# Altium PCB PCB1.PcbDoc
Units mil, origin at the board's own origin, x right, y up, seen from the top; angles counter-clockwise.
Board outline 3217 x 2066 mil, 2 copper layers (Top Layer, Bottom Layer); 28 components, 48 nets, 350 pads, 356 vias.
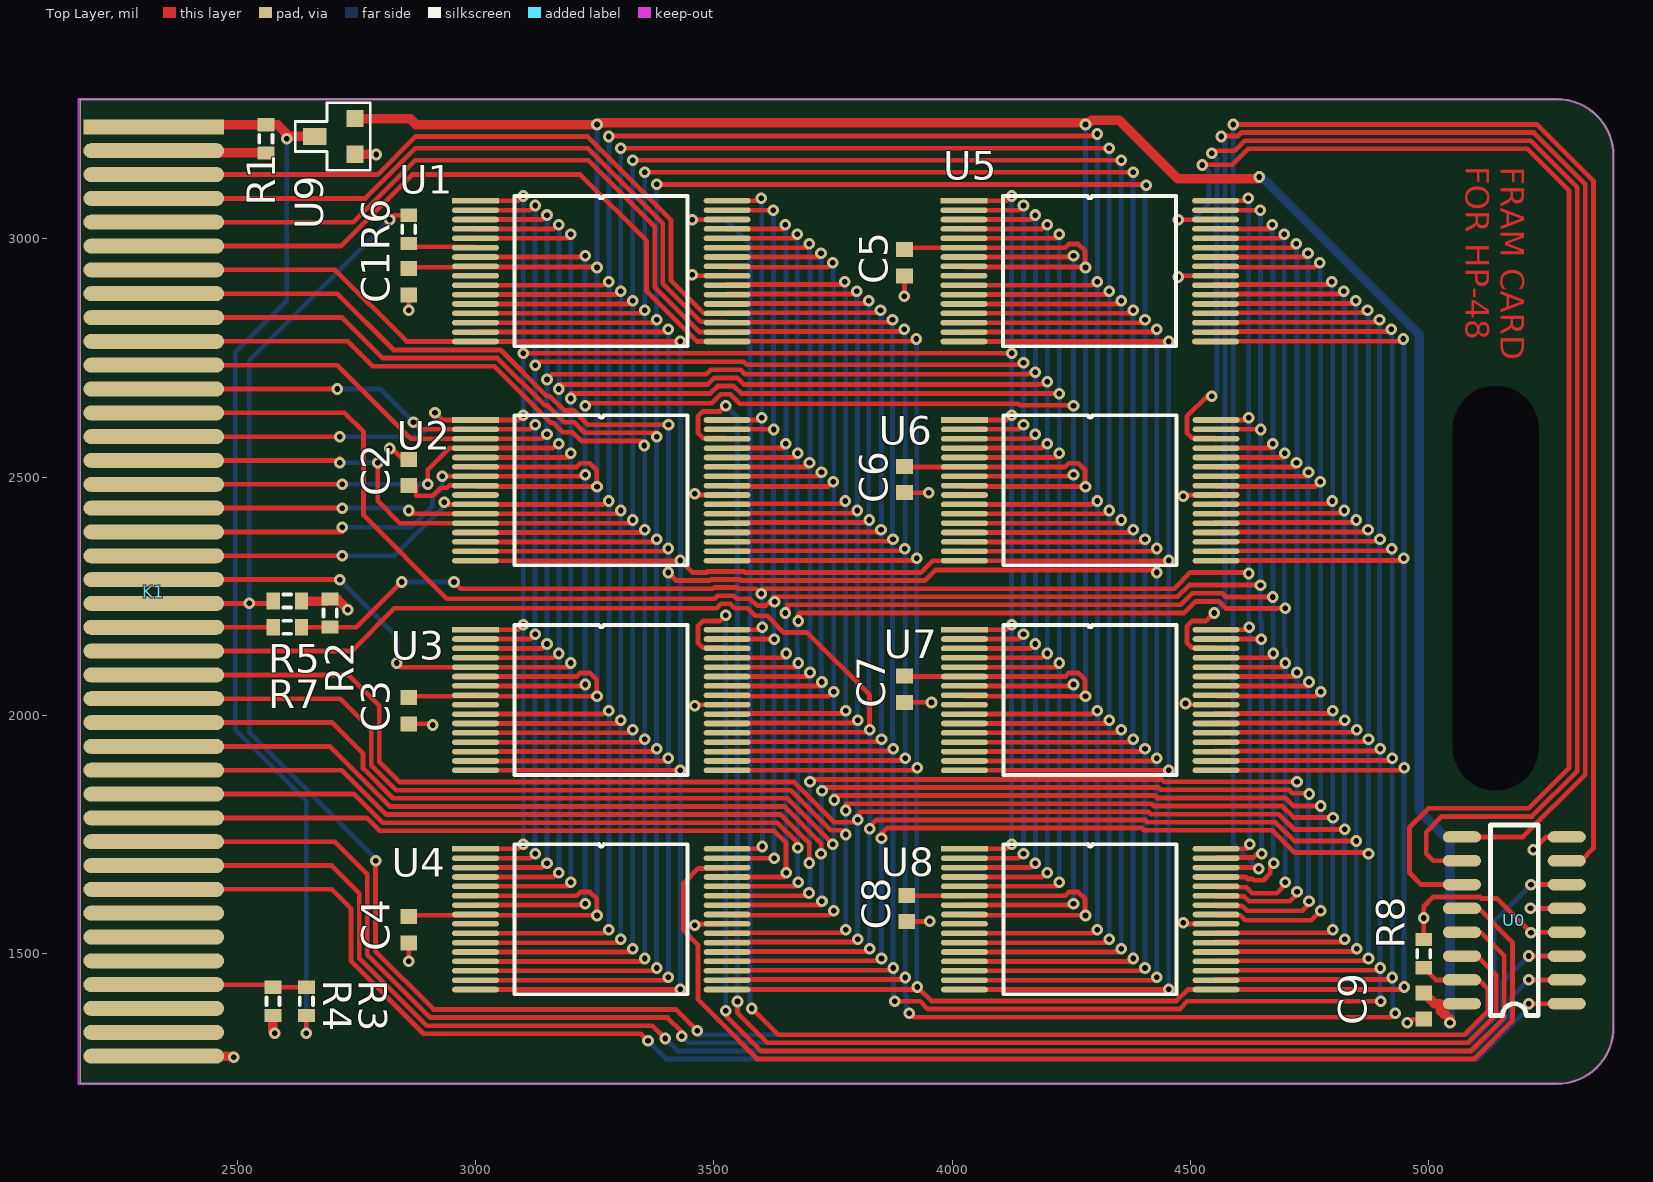
[diagram p0: Top Layer view]
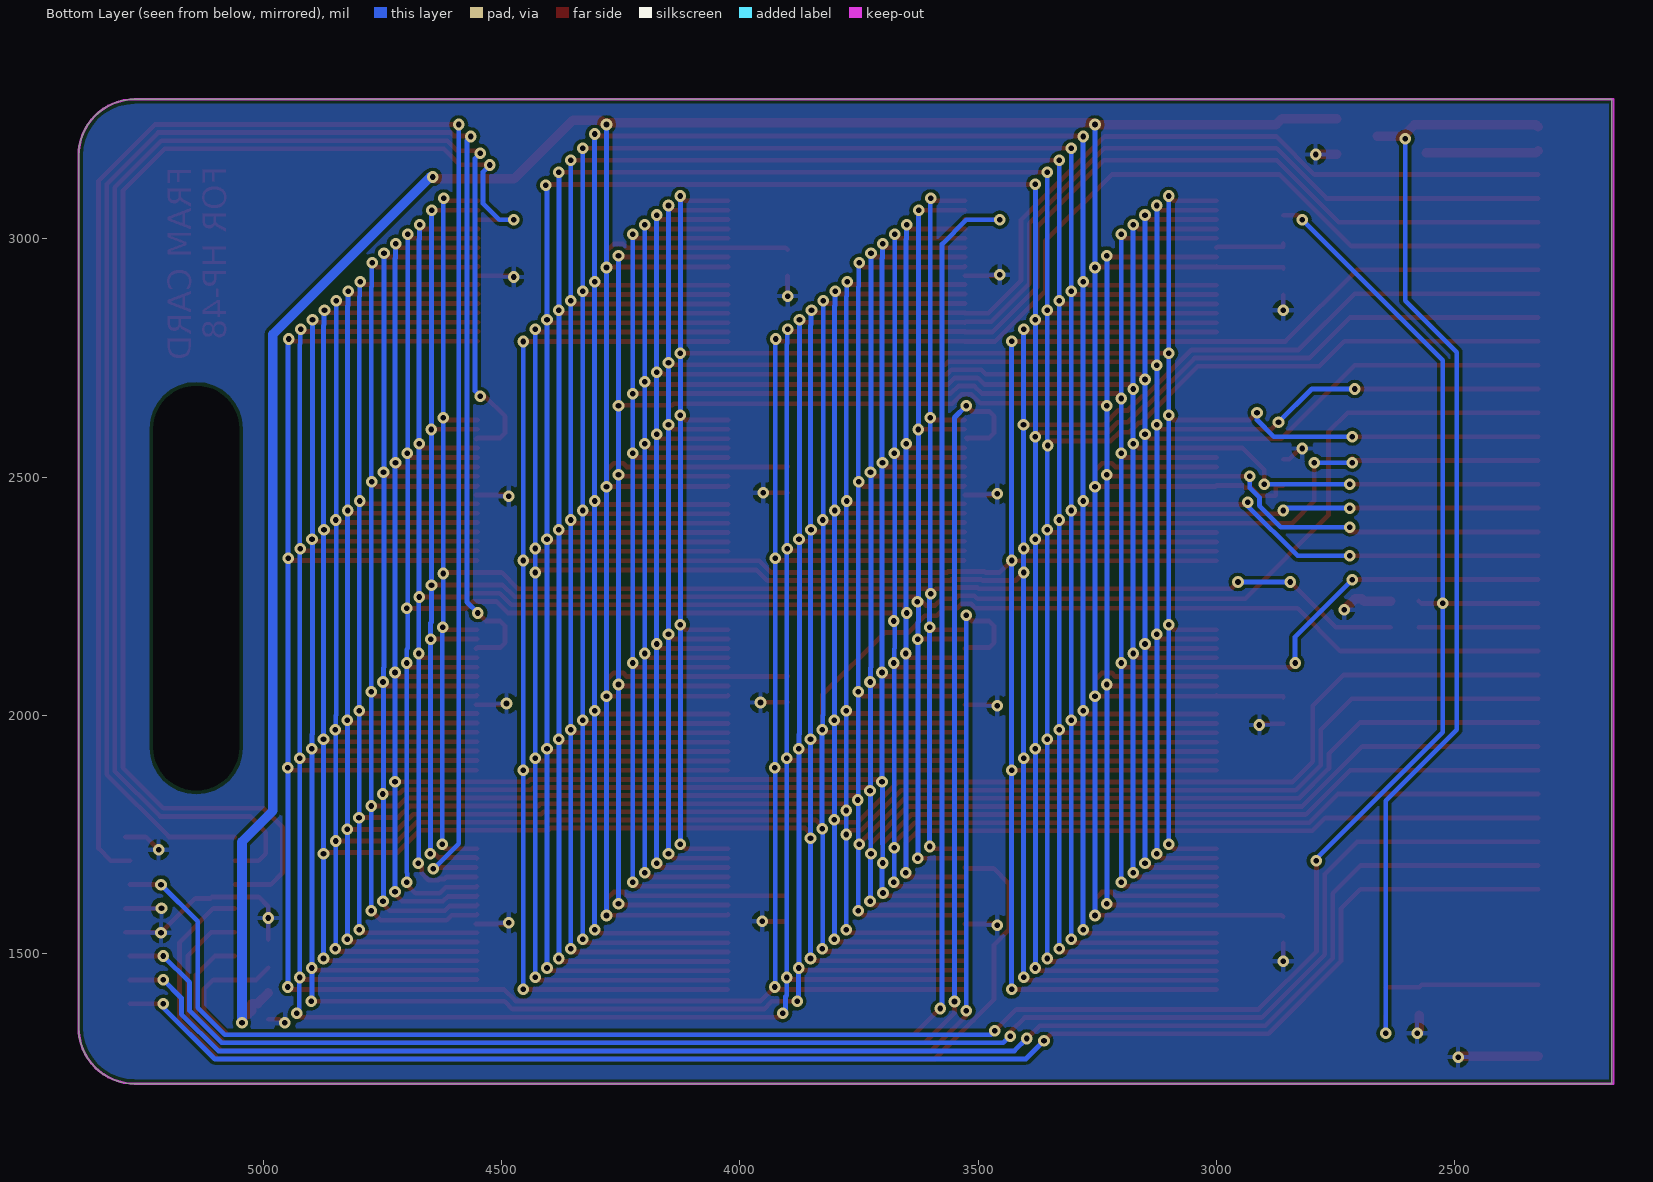
[diagram p1: Bottom Layer view, seen from below]

## Layer stack, top to bottom
Top Solder: solder mask 0.4, Solder Resist, Dk 3.5
Top Layer: signal copper 1.4
Dielectric1: dielectric 12.6, FR-4, Dk 4.8
Bottom Layer: signal copper 1.4
Bottom Solder: solder mask 0.4, Solder Resist, Dk 3.5

## Board outline
2171,1227 5270,1227 ccw(c5270,1345) 5388,1345 5388,3175 ccw(c5270,3175) 5270,3293 2171,3293

## Design rules (kind name [scope] priority, off if disabled: settings)
Clearance [All] p1: gap=7
PolygonConnect [All] p1: connectstyle=Relief reliefconductorwidth=10 reliefentries=4 polygonreliefangle="90 Angle" airgapwidth=10
RoutingVias [All] p1: holewidth=11.81 width=24.41 viastyle="Through Hole" minholewidth=11.81 minwidth=24.41 maxholewidth=11.81 maxwidth=24.41
SilkToSolderMaskClearance SilkscreenOverComponentPads [IsPad] p1: minsilkscreentomaskgap=10 clearancetoexposedcopper=TRUE
SolderMaskExpansion [All] p1: expansion=4
Width [All] p1: maxlimit=20 minlimit=7 preferedwidth=7
29 further rules are at their usual default settings.

## Components (designator, comment, footprint, x,y, rotation, side; value= is the part's Value field where it differs from the comment)
C1 "105" 1608[0603] 2860,2910 r90 top
C2 "104" 1608[0603] 2860,2510 r270 top
C3 "104" 1608[0603] 2860,2010 r90 top
C4 "104" 1608[0603] 2860,1550 r90 top
C5 "104" 1608[0603] 3900,2950 r90 top
C6 "104" 1608[0603] 3900,2495 r90 top
C7 "104" 1608[0603] 3900,2055 r90 top
C8 "104" 1608[0603] 3905,1595 r90 top
C9 "104" 1608[0603] 4990,1390 r90 top
K1 "PORT2" SOP80 2325,3235 r0 top
R1 "1M" J1-0603 2560,3210 r90 top
R2 "0R" J1-0603 2695,2215 r90 top
R3 "0R" J1-0603 2645,1400 r270 top
R4 "0R" J1-0603 2575,1400 r270 top
R5 "10K" J1-0603 2605,2240 r180 top
R6 "NC" J1-0603 2860,3020 r270 top
R7 "NC" J1-0603 2605,2185 r0 top
R8 "NC" J1-0603 4990,1500 r270 top
U0 "74ALS138" SO-16 5290,1395 r180 top
U1 "IS62LV1024LL" TSOP32 3000,3080 r0 top
U2 "IS62LV1024LL" TSOP32 3000,2620 r0 top
U3 "IS62LV1024LL" TSOP32 3000,2180 r0 top
U4 "IS62LV1024LL" TSOP32 3000,1720 r0 top
U5 "IS62LV1024LL" TSOP32 4025,3080 r0 top
U6 "IS62LV1024LL" TSOP32 4026,2620 r0 top
U7 "IS62LV1024LL" TSOP32 4026,2180 r0 top
U8 "IS62LV1024LL" TSOP32 4026,1720 r0 top
U9 "6209" SOT-23 2705,3215 r90 top

## Footprints (in the part's own frame and the unit in brackets; to place one, negate y for a bottom-side part, rotate by r counter-clockwise, add the part's x,y. Pads: shape width x height; smd on the part's side, far side on the other; paste and mask are expansions set on the pad)
1608[0603] [mm] "Chip Capacitor, Body 1.6x0.8mm, IPC High Density"
  rect 0.8x0.9 smd: 1(-0.7,0) 2(0.7,0)
  body extent -0.87,-0.48 0.87,0.48, height 1.3
J1-0603 [mm] "Chip Resistor, Body 1.6x0.8mm, IPC High Density"
  rect 0.7x0.9 smd: 1(-0.75,0) 2(0.75,0)
  silkscreen extent -0.2,-0.35 0.2,0.35, body extent -0.85,-0.48 0.85,0.48, height 0.9
SO-16 [mil]
  oval 80x24 smd: 1(0,0) 2(0,-50) 3(0,-100) 4(0,-150) 5(0,-200) 6(0,-250) 7(0,-300) 8(0,-350) 9(220,-350) 10(220,-300) 11(220,-250) 12(220,-200) 13(220,-150) 14(220,-100) 15(220,-50) 16(220,0)
  silkscreen extent 60,-375 160,25
SOP80 [mm]
  rect 7.5x0.8 smd: 1(0,0)
  oval 7.5x0.8 smd: 2(0,-1.27) 3(0,-2.54) 4(0,-3.81) 5(0,-5.08) 6(0,-6.35) 7(0,-7.62) 8(0,-8.89) 9(0,-10.16) 10(0,-11.43) 11(0,-12.7) 12(0,-13.97) 13(0,-15.24) 14(0,-16.51) 15(0,-17.78) 16(0,-19.05) 17(0,-20.32) 18(0,-21.59) 19(0,-22.86) 20(0,-24.13) 21(0,-25.4) 22(0,-26.67) 23(0,-27.94) 24(0,-29.21) 25(0,-30.48) 26(0,-31.75) 27(0,-33.02) 28(0,-34.29) 29(0,-35.56) 30(0,-36.83) 31(0,-38.1) 32(0,-39.37) 33(0,-40.64) 34(0,-41.91) 35(0,-43.18) 36(0,-44.45) 37(0,-45.72) 38(0,-46.99) 39(0,-48.26) 40(0,-49.53)
SOT-23 [mil]
  rect 36x36 smd: 1(-37.4,-42.18) 2(37.4,-42.18)
  rect 36x50 smd: 3(0,42.18)
  silkscreen extent -71,-74 71,83, body extent -55,-51 55,45, height 43
TSOP32 [mm]
  rect 2.5x0.3 smd: 1(0,0)
  oval 2.5x0.3 smd: 2(0,-0.5) 3(0,-1) 4(0,-1.5) 5(0,-2) 6(0,-2.5) 7(0,-3) 8(0,-3.5) 9(0,-4) 10(0,-4.5) 11(0,-5) 12(0,-5.5) 13(0,-6) 14(0,-6.5) 15(0,-7) 16(0,-7.5) 17(13.412,-7.5) 18(13.412,-7) 19(13.412,-6.5) 20(13.412,-6) 21(13.412,-5.5) 22(13.412,-5) 23(13.412,-4.5) 24(13.412,-4) 25(13.412,-3.5) 26(13.412,-3) 27(13.412,-2.5) 28(13.412,-2) 29(13.412,-1.5) 30(13.412,-1) 31(13.412,-0.5) 32(13.412,0)
  silkscreen extent 2.08,-7.75 11.3,0.25

## Part data
C1 C2 C3 C4 C5 C6 C7 C8 C9: library part "Cap Semi", "Capacitor (Semiconductor SIM Model)"
R1 R2 R3 R4 R5 R6 R7 R8: library part Res3, "Resistor"

## Free pads (board coordinates)
  round 0 hole 180 slot 850 at 90 deg: 0(5141,2267)

## Via types
v1: diameter 24.41, hole 11.81, Top Layer to Bottom Layer, 356 vias

## Nets (pads, with @x,y where several pads share a name; then routed paths per layer and width w, separated by ;. In a path a pad name is that pad's centre, name@x,y a point inside that pad or via, vN(x,y) a via of type N, cw(c..) or ccw(c..) an arc to the next point about the centre after c; other vN are vias at no path point)
A0: K1.3 U1.20 U2.20 U3.20 U4.20 U5.20 U6.20 U7.20 U8.20 | length 7838.4
  Top Layer w10: K1.3 2795,3135 2875,3215 3235,3215 3410,3040 3410,2912.87 3479.09,2843.78 U1.20 ; U1.20@3528.03,2844.98 3844.98,2844.98 v1(3850,2850) ; U2.20@3529.03,2384.98 3845.98,2384.98 v1(3851,2390) ; U4.20@3530.03,1484.98 3846.98,1484.98 v1(3852,1490) ; U3.20@3530.03,1944.98 3846.98,1944.98 v1(3852,1950) ; v1(3852,1741.95) 3852,1752 3863.8,1763.8 4397.72,1763.8 4402.72,1758.8 4671.56,1758.8 4717.97,1712.39 4872.61,1712.39 4874,1711 v1(4874,1710) ; U5.20@4550.03,2844.98 4866.98,2844.98 v1(4872,2850) ; U6.20@4551.03,2384.98 4867.98,2384.98 v1(4873,2390) ; U8.20@4552.03,1484.98 4868.98,1484.98 v1(4874,1490) ; U7.20@4552.03,1944.98 4868.98,1944.98 v1(4874,1950)
  Bottom Layer w10: v1(3850,2850) 3850.8,2849.2 3850.8,2819.97 3851.8,2818.97 3851.8,1490.2 v1(3852,1490) ; v1(4872,2850) 4872.8,2849.2 4872.8,2819.97 4873.8,2818.97 v1@4873.8,1710 ; v1(4874,1490) 4873.8,1490.2 v1@4873.8,1710 ; v1(4874,1710) v1@4873.8,1710
A1: K1.4 U1.19 U2.19 U3.19 U4.19 U5.19 U6.19 U7.19 U8.19 | length 8160.6
  Top Layer w10: K1.4 2769.04,3085 2874.04,3190 3235.96,3190 3393,3032.96 3393,2905.83 3472.95,2825.87 3526.25,2825.87 U1.19 ; U1.19@3528.03,2825.3 3870.3,2825.3 v1(3875,2830) ; U2.19@3529.03,2365.3 3871.3,2365.3 v1(3876,2370) ; U4.19@3530.03,1465.3 3872.3,1465.3 v1(3877,1470) ; U3.19@3530.03,1925.3 3872.3,1925.3 v1(3877,1930) ; v1(3880,1400) 3932.96,1400 3949.16,1383.8 4477.84,1383.8 4494.04,1400 v1(4900,1400) ; U5.19@4550.03,2825.3 4892.3,2825.3 v1(4897,2830) ; U6.19@4551.03,2365.3 4893.3,2365.3 v1(4898,2370) ; U8.19@4552.03,1465.3 4894.3,1465.3 v1(4899,1470) ; U7.19@4552.03,1925.3 4894.3,1925.3 v1(4899,1930)
  Bottom Layer w10: v1(3875,2830) 3875.2,2829.8 3875.2,1961.03 3876.2,1960.03 3876.2,1470.8 v1(3877,1470) 3877,1403 v1(3880,1400) ; v1(4897,2830) 4897.2,2829.8 4897.2,1961.03 4898.2,1960.03 4898.2,1401.8 v1(4900,1400)
A2: K1.5 U1.18 U2.18 U3.18 U4.18 U5.18 U6.18 U7.18 U8.18 | length 8375.2
  Top Layer w10: K1.5 2743.08,3035 2873.08,3165 3236.92,3165 3376,3025.92 3376,2898.78 3470.37,2804.41 U1.18 ; U1.18@3528.03,2805.61 3895.61,2805.61 v1(3900,2810) ; U2.18@3529.03,2345.61 3896.61,2345.61 v1(3901,2350) ; U4.18@3530.03,1445.61 3897.61,1445.61 v1(3902,1450) ; U3.18@3530.03,1905.61 3897.61,1905.61 v1(3902,1910) ; v1(3910,1375) 3918.2,1366.8 4921.8,1366.8 v1(4930,1375) ; U5.18@4550.03,2805.61 4917.61,2805.61 v1(4922,2810) ; U6.18@4551.03,2345.61 4918.61,2345.61 v1(4923,2350) ; U8.18@4552.03,1445.61 4919.61,1445.61 v1(4924,1450) ; U7.18@4552.03,1905.61 4919.61,1905.61 v1(4924,1910)
  Bottom Layer w10: v1(3900,2810) 3900.8,2809.2 3900.8,2779.97 3901.8,2778.97 3901.8,1450.2 v1(3902,1450) 3902,1412.23 3904.2,1410.03 3904.2,1380.8 v1(3910,1375) ; v1(4922,2810) 4922.8,2809.2 4922.8,2779.97 4923.8,2778.97 4923.8,1450.2 v1(4924,1450) 4924.8,1449.2 4924.8,1380.2 v1(4930,1375)
A3: K1.6 U1.17 U2.17 U3.17 U4.17 U5.17 U6.17 U7.17 U8.17 | length 8027.8
  Top Layer w10: K1.6 2717.12,2985 2867.12,3135 3220,3135 3359,2996 3359,2890.23 3464.51,2784.72 U1.17 ; U1.17@3528.96,2785 3920,2785 v1(3925,2790) ; U2.17@3529.96,2325 3921,2325 v1(3926,2330) ; U4.17@3530.96,1425 3922,1425 v1(3927,1430) 3956.2,1400.8 4470.8,1400.8 4494.73,1424.72 U8.17 ; U3.17@3530.96,1885 3922,1885 v1(3927,1890) ; U5.17@4550.96,2785 4942,2785 v1(4947,2790) ; U6.17@4551.96,2325 4943,2325 v1(4948,2330) ; U8.17@4552.96,1425 4944,1425 v1(4949,1430) ; U7.17@4552.96,1885 4944,1885 v1(4949,1890)
  Bottom Layer w10: v1(3925,2790) 3926.2,2788.8 3926.2,1430.8 v1(3927,1430) ; v1(4947,2790) 4948.2,2788.8 4948.2,1430.8 v1(4949,1430)
A4: K1.7 U1.16 U2.16 U3.16 U4.16 U5.16 U6.16 U7.16 U8.16 | length 7512.6
  Top Layer w10: K1.7 2705,2935 2855.28,2784.72 U1.16 3429.72,2784.72 v1(3430,2785) ; U4.16 3429.72,1424.72 v1(3430,1425) ; U3.16 3429.72,1884.72 v1(3430,1885) ; U2.16 3429.72,2324.72 v1(3430,2325) 3455,2300 3484.6,2300 3486.81,2302.2 3563.19,2302.2 3565.4,2300 3935,2300 3959.72,2324.72 U6.16 v1@4454.73,2324.72 ; U5.16 v1(4454.73,2784.72) ; U8.16 4454.73,1424.72 v1(4455,1425) ; U7.16 4454.73,1884.72 v1(4455,1885)
  Bottom Layer w10: v1(3430,1425) v1(3430,1885) v1(3430,2325) v1(3430,2785) ; v1(4454.73,2784.72) 4454.73,2325.28 v1(4455,2325) v1(4455,1885) v1(4455,1425)
A5: K1.8 U1.15 U2.15 U3.15 U4.15 U5.15 U6.15 U7.15 U8.15 | length 8222.2
  Top Layer w10: K1.8 2710,2885 2828.18,2766.82 3053.18,2766.82 3150,2670 3155.77,2670 3185.77,2640 3205.8,2640 ; U4.15 3398.59,1444.41 3404.39,1450.21 v1(3404.79,1450.21) ; U3.15 v1@3398.59,1904.41 ; U2.15 v1@3398.59,2344.41 ; U1.15 3398.59,2804.41 3404.39,2810.21 v1(3404.79,2810.21) ; 3205.8,2639.97 3235.77,2610 v1(3405,2610) ; v1@3400,2300 v1(3404.79,2300) 3421.79,2283 3491.64,2283 3493.85,2285.2 3556.15,2285.2 3558.36,2283 3943,2283 3965,2305 4430,2305 v1(4430,2300) ; U8.15@4025,1444.41 v1@4423.59,1444.41 ; U7.15@4025,1904.41 v1@4423.59,1904.41 ; U6.15@4025,2344.41 v1@4423.59,2344.41 ; U5.15 4423.59,2804.41 4429.39,2810.21 v1(4429.79,2810.21)
  Bottom Layer w10: v1@3399,1446 3404.79,1451.79 v1(3404.79,1910.21) v1(3404.79,2300) v1(3404.79,2350.21) v1(3404.79,2810.21) ; v1@3399,1906 v1@3403.21,1910.21 ; v1@3399,2346 v1@3403.21,2350.21 ; v1@3399,2806 v1@3403.21,2810.21 ; v1@4424,1906 v1@4428.21,1910.21 ; v1@4424,2346 v1@4428.21,2350.21 ; v1@4424,2806 v1@4428.21,2810.21 ; v1@4429.79,1451.79 v1(4429.79,1910.21) v1(4429.79,2350.21) v1(4429.79,2810.21)
  other v1: 4429.79,1450.21
A6: K1.9 U1.14 U2.14 U3.14 U4.14 U5.14 U6.14 U7.14 U8.14 | length 8544.9
  Top Layer w10: K1.9 2720,2835 2805.18,2749.82 3046.14,2749.82 3145.09,2650.86 3150.86,2650.86 3186.73,2615 3206.73,2615 3228.73,2593 3380,2593 v1(3380,2585) ; U4.14 3374.09,1464.1 v1(3380,1470) ; U3.14 3374.09,1924.1 v1(3380,1930) ; U2.14 3374.09,2364.09 v1(3380,2370) ; U1.14 3374.09,2824.09 v1(3380,2830) ; v1(3380,3115) 3380.8,3114.2 4405.8,3114.2 v1(4407.5,3112.5) ; U8.14@4025,1464.1 4399.1,1464.1 v1(4405,1470) ; U7.14@4025,1924.1 4399.1,1924.1 v1(4405,1930) ; U6.14@4025,2364.09 4399.1,2364.09 v1(4405,2370) ; U5.14 4399.1,2824.09 v1(4405,2830)
  Bottom Layer w10: v1(3380,1470) v1(3380,1930) v1(3380,2370) v1(3380,2585) v1(3380,2830) v1(3380,3115) ; v1(4405,1470) v1(4405,1930) v1(4405,2370) v1(4405,2830) 4405,3115 v1(4407.5,3112.5)
A7: K1.10 U1.13 U2.13 U3.13 U4.13 U5.13 U6.13 U7.13 U8.13 | length 8308
  Top Layer w10: K1.10 2731.92,2785 2784.1,2732.82 3039.1,2732.82 3157.71,2614.2 3163.48,2614.2 3183.48,2594.2 3203.48,2594.2 3221.69,2576 3349,2576 3354.2,2570.8 v1(3354.2,2566.38) ; U4.13 3348.78,1483.78 v1(3355,1490) ; U3.13 3348.78,1943.78 v1(3355,1950) ; U2.13 3348.78,2383.78 v1(3355,2390) ; U1.13 3348.78,2843.78 v1(3355,2850) ; v1(3355,3140) v1(4380,3140) ; U8.13@4025,1483.78 4373.78,1483.78 v1(4380,1490) ; U7.13@4025,1943.78 4373.78,1943.78 v1(4380,1950) ; U6.13@4025,2383.78 4373.78,2383.78 v1(4380,2390) ; U5.13 4373.78,2843.78 v1(4380,2850)
  Bottom Layer w10: v1(3355,1490) v1(3355,1950) v1(3355,2390) v1(3355,2850) v1(3355,3140) ; v1(4380,1490) v1(4380,1950) v1(4380,2390) v1(4380,2850) v1(4380,3140)
A8: K1.11 U1.3 U2.3 U3.3 U4.3 U5.3 U6.3 U7.3 U8.3 | length 5683.6
  Top Layer w10: K1.11 2710,2735 2864.37,2580.63 U2.3 3140,2580.63 ; U4.3 3140,1680.63 ; U3.3 3140,2140.63 ; U1.3 3140,3040.63 3145.91,3046.54 3148.46,3046.54 3150,3045 v1(3150,3050) ; v1(3150,2705) 3160,2715 3160,2715.8 3484.44,2715.8 3493.85,2725.2 3556.15,2725.2 3565.56,2715.8 4160.03,2715.8 4163.03,2718.8 4167.8,2718.8 4175,2711.59 v1(4175,2720) ; U8.3@4025,1680.63 4165,1680.63 4170.91,1686.54 4173.46,1686.54 4175,1685 v1(4175,1690) ; U7.3@4025,2140.63 4165,2140.63 ; U6.3@4025,2580.63 4165,2580.63 ; U5.3 4165,3040.63 4170.91,3046.54 4173.46,3046.54 4175,3045 v1(4175,3050)
  Bottom Layer w10: v1(3150,1690) v1(3150,2150) v1(3150,2590) v1(3150,3050) ; v1(4175,1690) v1(4175,2150) v1(4175,2590) v1(4175,3050)
A9: K1.12 U1.2 U2.2 U3.2 U4.2 U5.2 U6.2 U7.2 U8.2 | length 5496.5
  Top Layer w10: K1.12 v1(2710,2685) ; v1(2870,2615) 2884.68,2600.32 U2.2 3115.32,2600.32 v1(3125,2610) ; U4.2 3115.32,1700.32 v1(3125,1710) ; U3.2 3115.32,2160.32 v1(3125,2170) ; U1.2 3115.32,3060.32 v1(3125,3070) ; v1(3125,2735) 3132.2,2742.2 3563.19,2742.2 3569.6,2735.8 4149.2,2735.8 4150,2736.59 v1(4150,2740) ; U8.2@4025,1700.32 4140.31,1700.32 v1(4150,1710) ; U7.2@4025,2160.32 4140.31,2160.32 v1(4150,2170) ; U6.2@4025,2600.32 4140.31,2600.32 v1(4150,2610) ; U5.2 4140.31,3060.32 v1(4150,3070)
  Bottom Layer w10: v1(2710,2685) 2800,2685 v1(2870,2615) ; v1(3125,1710) v1(3125,2170) v1(3125,2610) v1(3125,2735) v1(3125,3070) ; v1(4150,1710) v1(4150,2170) v1(4150,2610) v1(4150,3070)
A10: K1.13 U1.31 U2.31 U3.31 U4.31 U5.31 U6.31 U7.31 U8.31 | length 6125.7
  Top Layer w10: K1.13 2725,2635 2765,2595 2765,2420 2940,2245 3501.73,2245 3507.93,2251.2 3542.07,2251.2 3548.27,2245 3575.77,2245 3589.97,2230.8 3610.03,2230.8 3619.99,2240.76 3625,2240.76 3625,2249 4473.04,2249 4497.63,2273.59 4646.41,2273.59 v1(4647.2,2272.8) ; U1.31 3624.68,3060.32 v1(3625,3060) ; U2.31@3529.03,2600.32 3625.68,2600.32 v1(3626,2600) ; U4.31@3530.03,1700.32 3626.68,1700.32 v1(3627,1700) ; U3.31@3530.03,2160.32 3626.68,2160.32 v1(3627,2160) v1@3631,2160 ; U5.31@4550.03,3060.32 4646.69,3060.32 v1(4647,3060) ; U6.31@4551.03,2600.32 4647.69,2600.32 v1(4648,2600) ; U8.31@4552.03,1700.32 4552.35,1700 4554.44,1702.09 4632.86,1702.09 4640.77,1710 v1(4650,1710) ; U7.31@4552.03,2160.32 4648.69,2160.32 v1(4649,2160)
  Bottom Layer w10: v1(3625,3060) 3625.2,3059.8 3625.2,2196.03 3626.2,2195.03 3626.2,1700.8 v1(3627,1700) ; v1(4647,3060) 4647.2,3059.8 v1(4647.2,2272.8) 4647.2,2196.03 4649.2,2194.03 4649.2,1711 v1@4648.2,1710 ; v1@4650,1702.59 v1(4650,1710)
  other v1: 3627.59,2238.17
A11: K1.14 U1.1 U2.1 U3.1 U4.1 U5.1 U6.1 U7.1 U8.1 | length 5288.8
  Top Layer w10: K1.14 v1(2715,2585) ; v1(2915,2635) 2930,2620 U2.1 3090,2620 v1(3100,2630) ; U4.1 3090,1720 v1(3100,1730) ; U3.1 3090,2180 v1(3100,2190) ; U1.1 3090,3080 v1(3100,3090) ; v1(3100,2760) v1(4125,2760) ; U8.1@4025,1720 4115,1720 v1(4125,1730) ; U7.1@4025,2180 4115,2180 v1(4125,2190) ; U6.1@4025,2620 4115,2620 v1(4125,2630) ; U5.1 4115,3080 v1(4125,3090)
  Bottom Layer w10: v1(2715,2585) 2880,2585 2915,2620 v1(2915,2635) ; v1(3100,1730) v1(3100,2190) v1(3100,2630) v1(3100,2760) v1(3100,3090) ; v1(4125,1730) v1(4125,2190) v1(4125,2630) v1(4125,2760) v1(4125,3090)
A12: K1.15 U1.12 U2.12 U3.12 U4.12 U5.12 U6.12 U7.12 U8.12 | length 7794.7
  Top Layer w10: K1.15 2710,2535 2715,2540 v1(2715,2530) ; v1(2795,2530) 2795,2450 2841.53,2403.47 U2.12 3323.47,2403.47 v1(3330,2410) ; U4.12 3323.47,1503.46 v1(3330,1510) ; U3.12 3323.47,1963.46 v1(3330,1970) ; U1.12 3323.47,2863.47 v1(3330,2870) ; v1(3330,3165) v1(4355,3165) ; U8.12@4025,1503.46 4348.47,1503.46 v1(4355,1510) ; U7.12@4025,1963.46 4348.47,1963.46 v1(4355,1970) ; U6.12@4025,2403.47 4348.47,2403.47 v1(4355,2410) ; U5.12 4348.47,2863.47 v1(4355,2870)
  Bottom Layer w10: v1(2715,2530) v1(2795,2530) ; v1@3324.13,1510 v1(3330,1510) v1(3330,1970) v1(3330,2410) v1(3330,2870) v1(3330,3165) ; v1@4349.13,1510 v1(4355,1510) v1(4355,1970) v1(4355,2410) v1(4355,2870) v1(4355,3165)
A13: K1.16 U1.4 U2.4 U3.4 U4.4 U5.4 U6.4 U7.4 U8.4 | length 5851.3
  Top Layer w10: K1.16 v1(2720,2485) ; v1(2900,2485) 2900,2515.95 2945,2560.95 U2.4 3164.05,2560.95 ; U4.4 3164.05,1660.94 ; U3.4 3164.05,2120.95 ; U1.4 3164.05,3020.95 3163.67,3021.33 3172.34,3030 v1(3175,3030) ; v1(3175,2685) 3175,2694.18 3175.41,2694.59 3487.28,2694.59 3500.89,2708.2 3549.11,2708.2 3562.72,2694.59 4182.04,2694.59 4182.45,2695 4195,2695 v1(4200,2700) ; U8.4@4025,1660.94 4189.06,1660.94 4188.67,1661.33 4197.34,1670 v1(4200,1670) ; U7.4@4025,2120.95 4189.06,2120.95 ; U6.4@4025,2560.95 4189.06,2560.95 ; U5.4 4189.06,3020.95 4188.67,3021.33 4197.34,3030 v1(4200,3030)
  Bottom Layer w10: v1(2720,2485) v1(2900,2485) ; v1(3175,1670) v1(3175,2130) v1(3175,2570) v1(3175,3030) ; v1(4200,1670) v1(4200,2130) v1(4200,2570) v1(4200,2700) v1(4200,3030)
A14: K1.17 U1.11 U2.11 U3.11 U4.11 U5.11 U6.11 U7.11 U8.11 | length 7502.5
  Top Layer w10: K1.17 v1(2720,2435) ; v1(2860,2430) 2866.85,2423.15 U2.11 3298.15,2423.15 v1(3305,2430) ; U4.11 3298.15,1523.15 v1(3305,1530) ; U3.11 3298.15,1983.15 v1(3305,1990) ; U1.11 3298.15,2883.15 v1(3305,2890) ; v1(3305,3190) v1(4330,3190) ; U8.11@4025,1523.15 4323.15,1523.15 v1(4330,1530) ; U7.11@4025,1983.15 4323.15,1983.15 v1(4330,1990) ; U6.11@4025,2423.15 4323.15,2423.15 v1(4330,2430) ; U5.11 4323.15,2883.15 v1(4330,2890)
  Bottom Layer w10: v1(2720,2435) v1@2860,2435 ; v1(3305,1530) 3301,1530 3305,1534 v1(3305,1990) v1(3305,2430) v1(3305,2890) v1(3305,3190) ; v1(4330,1530) 4326,1530 4330,1534 v1(4330,1990) v1(4330,2430) v1(4330,2890) 4326,2890 4330,2894 v1(4330,3190)
A15: K1.18 U1.7 U2.7 U3.7 U4.7 U5.7 U6.7 U7.7 U8.7 | length 6405.1
  Top Layer w10: K1.18 2720,2385 v1(2720,2395) ; v1(2930,2501.89) U2.7 3231.89,2501.89 3230,2503.78 v1(3230,2505) ; U4.7 3231.89,1601.89 3230,1603.78 v1(3230,1605) ; U3.7 3231.89,2061.89 3230,2063.78 v1(3230,2065) ; U1.7 3231.89,2961.89 3230,2963.78 v1(3230,2965) ; v1(3230,2650) 3234.91,2654.91 3495.67,2654.91 3514.97,2674.2 3535.03,2674.2 3555.03,2654.2 4139.2,2654.2 4142.61,2650.8 4254.2,2650.8 v1(4255,2650) ; U8.7@4025,1601.89 4256.89,1601.89 4255,1603.78 v1(4255,1605) ; U7.7@4025,2061.89 4256.89,2061.89 4255,2063.78 v1(4255,2065) ; U6.7@4025,2501.89 4256.89,2501.89 4255,2503.78 v1(4255,2505) ; U5.7 4256.89,2961.89 4255,2963.78 v1(4255,2965)
  Bottom Layer w10: v1(2720,2395) 2865,2395 2910,2440 2910,2457.38 2930,2477.38 v1(2930,2501.89) ; v1(3230,1605) v1(3230,2065) v1(3230,2505) v1(3230,2965) ; v1(4255,1605) v1(4255,2065) v1(4255,2505) v1(4255,2650) v1(4255,2965)
A16: K1.19 U1.10 U2.10 U3.10 U4.10 U5.10 U6.10 U7.10 U8.10 | length 7312
  Top Layer w10: K1.19 v1(2720,2335) ; v1(2934.2,2447.35) 2938.72,2442.84 U2.10 3267.84,2442.84 ; U4.10 3267.84,1542.84 3275,1550 v1(3280,1550) ; U3.10 3267.84,2002.84 ; U1.10 3267.84,2902.84 3275,2910 v1(3280,2910) ; v1(3280,3215) 3275,3215 3275.8,3215.8 4300.8,3215.8 v1(4305,3220) ; U8.10@4025,1542.84 4292.84,1542.84 4300,1550 v1(4305,1550) ; U7.10@4025,2002.84 4292.84,2002.84 ; U6.10@4025,2442.84 4292.84,2442.84 ; U5.10 4292.84,2902.84 4300,2910 v1(4305,2910)
  Bottom Layer w10: v1(2720,2335) 2830,2335 2935,2440 2935,2446.56 v1(2934.2,2447.35) ; v1@3276.38,1543.62 v1@3277.77,1545 ; v1@3276.38,2903.62 v1@3277.77,2905 ; v1(3280,1550) v1(3280,2010) v1(3280,2450) v1(3280,2910) v1(3280,3215) ; v1@4301.38,1543.62 v1@4302.77,1545 ; v1@4301.38,2903.62 v1@4302.77,2905 ; v1(4305,1550) v1(4305,2010) v1(4305,2450) v1(4305,2910) v1(4305,3220)
A17: K1.31 U0.3 | length 3344.5
  Top Layer w10: K1.31 2705,1735 2773,1667 2773,1497.96 2904.96,1366 3402.77,1366 3433,1335.77 v1(3433,1327) ; v1(5210,1495) U0.3@5280,1495
  Bottom Layer w10: v1(3433,1327) 3434,1327 3448,1313 5088,1313 5155,1380 5155,1440 v1(5210,1495)
A18: K1.32 U0.2 | length 3277.5
  Top Layer w10: K1.32 2698,1685 2756,1627 2756,1490.92 2897.92,1349 3371,1349 v1(3398,1322) ; v1(5210,1445) U0.2@5280,1445
  Bottom Layer w10: v1(3398,1322) 3424,1296 5095.04,1296 5172,1372.96 5172,1407 v1(5210,1445)
A19: K1.33 U0.1 | length 3219.8
  Top Layer w10: K1.33 2698,1635 2739,1594 2739,1483.88 2890.88,1332 3347,1332 v1(3362,1317) ; v1(5210,1395) U0.1@5280,1395
  Bottom Layer w10: v1(3362,1317) 3400,1279 5102.08,1279 5210,1386.92 v1(5210,1395)
A20: K1.34
A21: K1.35
CARDTYPE: K1.37 R3.1 R4.1 | length 322.3
  Top Layer w10: K1.37 2569.53,1435 R4.1 R3.1
CE: K1.21 R5.2 R6.1 U0.6 | length 4858.4
  Top Layer w10: K1.21 v1(2525,2235) 2570.47,2235 R5.2 ; v1(2791,1695) 2790,1695 2790,1505 2912,1383 3420,1383 v1(3465,1338) ; v1(2820,3040) 2829.53,3049.53 R6.1 ; v1(5215,1645) U0.6@5280,1645
  Bottom Layer w10: v1@2790,1700 2525,1965 v1(2525,2235) 2525,2745 v1(2820,3040) ; v1(3465,1338) 3473,1330 5080.96,1330 5138,1387.04 5138,1568 v1(5215,1645)
CE1: R8.2 U0.15 U1.30 | length 3608.4
  Top Layer w10: v1(3455,3040) 3527.4,3040 U1.30 ; v1(3580,1385) 3635,1330 5075,1330 5125,1380 5125,1425 5105,1445 U0.15 5015.47,1445 R8.2
  Bottom Layer w10: v1(3455,3040) 3525,3040 3575.8,2989.2 3575.8,1389.2 v1(3580,1385)
CE2: U0.14 U2.30 | length 3277.2
  Top Layer w10: U2.30@3522.59,2580 3525,2582.41 3477.31,2582.41 3466.82,2592.9 3466.82,2627.42 3477.31,2637.91 3512.91,2637.91 v1(3525,2650) ; v1(3549.8,1399.61) 3549.8,1399.8 3550,1400 3550,1375 3612,1313 5082.04,1313 5142,1372.96 5142,1455 5102,1495 U0.14@5060,1495
  Bottom Layer w10: v1(3525,2650) 3549.8,2625.2 v1(3549.8,1399.61)
CE3: U0.13 U3.30 | length 2956.9
  Top Layer w10: v1(3525,1380) 3525,1370 3599,1296 5089.08,1296 5159,1365.92 5159,1496 5110,1545 U0.13@5060,1545 ; v1(3525,2210) 3512.91,2197.91 3477.31,2197.91 3466.82,2187.42 3466.82,2152.9 3477.31,2142.41 3525,2142.41 3527.4,2140 U3.30
  Bottom Layer w10: v1(3525,2210) v1(3525,1380) v1@3530,1380
CE4: U0.12 U4.30 | length 2467.1
  Top Layer w10: U4.30 3526.25,1678.85 3467.52,1678.85 3435.8,1647.12 3435.8,1549.97 3466.82,1518.95 3466.82,1403.95 3510,1360.77 3510,1360 3591,1279 5096.12,1279 5176,1358.88 5176,1524 5105,1595 U0.12@5060,1595
CE5: U0.11 U5.30 | length 2866.8
  Top Layer w10: v1(4475,3040) 4552.4,3040 U5.30 ; v1(4525,3155) 4525.8,3155.8 4588.11,3155.8 4621.31,3189 5207,3189 5295,3101 5295,1890 5210,1805 5000,1805 4960,1765 4960,1670 4985,1645 U0.11@5060,1645
  Bottom Layer w10: v1(4475,3040) 4505,3040 4539,3074 4539,3141 v1(4525,3155)
CE6: U0.10 U6.30 | length 3219.9
  Top Layer w10: v1(4545,2670) 4535.4,2670 4492.82,2627.42 4492.82,2592.9 4503.31,2582.41 4550.99,2582.41 4553.4,2580 U6.30 ; v1(4545,3180) 4550,3185 4593.27,3185 4614.27,3206 5214.04,3206 5312,3108.04 5312,1882.96 5217.04,1788 5028,1788 4995,1755 4995,1710 5010,1695 U0.10@5060,1695
  Bottom Layer w10: v1(4545,2670) 4556,2681 4556,3169 v1(4545,3180)
CE7: U0.9 U7.30 | length 3557.2
  Top Layer w10: v1(4550,2215) 4532.91,2197.91 4503.31,2197.91 4492.82,2187.42 4492.82,2152.9 4503.31,2142.41 4550.99,2142.41 4553.4,2140 U7.30 ; v1(4565,3215) 4570,3215 4570.8,3215.8 4600.03,3215.8 4607.23,3223 5221.08,3223 5329,3115.08 5329,1875.92 5198.08,1745 U0.9@5060,1745
  Bottom Layer w10: v1(4550,2215) 4573,2238 4573,3207 v1(4565,3215)
CE8: U0.7 U8.30 | length 3951.9
  Top Layer w10: U8.30 v1@4638.73,1680.63 ; v1(4590,3240) 5228.12,3240 5346,3122.12 5346,1721 5320,1695 U0.7@5280,1695
  Bottom Layer w10: v1(4590,3240) 4590,1730.77 4642.38,1678.39 v1(4643.59,1678.39)
CES: R6.2 U1.6 | length 147.9
  Top Layer w10: R6.2 2860,2983.35 2998.22,2983.35 U1.6
D0: K1.23 U1.21 U2.21 U3.21 U4.21 U5.21 U6.21 U7.21 U8.21 | length 7868.8
  Top Layer w10: K1.23 2740,2135 2830,2225 3505.77,2225 3514.97,2234.2 3535.03,2234.2 3544.23,2225 3571.73,2225 3587.52,2209.2 3612.03,2209.2 3647.26,2173.97 3696.03,2173.97 3827,2043 v1(3827,1970) 3821.67,1964.67 U3.21@3530.03,1964.67 ; U1.21@3528.03,2864.67 3819.67,2864.67 v1(3825,2870) ; U2.21@3529.03,2404.67 3820.67,2404.67 v1(3826,2410) ; U4.21@3530.03,1504.67 3821.67,1504.67 v1(3827,1510) ; v1@3822.21,1756.58 v1(3827.59,1761.96) 3827.59,1767.59 3840.8,1780.8 4404.77,1780.8 4409.77,1775.8 4678.6,1775.8 4717.81,1736.59 v1(4848.41,1736.59) ; U5.21@4550.03,2864.67 4841.67,2864.67 v1(4847,2870) ; U6.21@4551.03,2404.67 4842.67,2404.67 v1(4848,2410) ; U8.21@4552.03,1504.67 4843.67,1504.67 v1(4849,1510) ; U7.21@4552.03,1964.67 4843.67,1964.67 v1(4849,1970)
  Bottom Layer w10: v1(3825,2870) 3825.2,2869.8 3825.2,2001.03 3826.2,2000.03 3826.2,1970 3827.59,1968.61 v1(3827.59,1761.96) ; v1@3826.2,1761.96 3826.2,1510.8 v1(3827,1510) ; v1(4847,2870) 4847.2,2869.8 4847.2,2001.03 4848.2,2000.03 4848.2,1510.8 v1(4849,1510)
D1: K1.24 U1.22 U2.22 U3.22 U4.22 U5.22 U6.22 U7.22 U8.22 | length 7644.3
  Top Layer w10: K1.24 2733,2085 2798,2020 2798,1902.96 2840.96,1860 3668.56,1860 3752.77,1775.8 3797.01,1775.8 v1(3802,1780.79) 3802,1790.97 3808.82,1797.8 4411.81,1797.8 4416.81,1792.8 4685.64,1792.8 4717.64,1760.8 v1(4824,1760.8) ; U1.22@3528.03,2884.35 3794.35,2884.35 v1(3800,2890) ; U2.22@3529.03,2424.35 3795.35,2424.35 v1(3801,2430) ; U4.22@3530.03,1524.35 3796.35,1524.35 v1(3802,1530) ; U3.22@3530.03,1984.35 3796.35,1984.35 v1(3802,1990) ; U5.22@4550.03,2884.35 4816.35,2884.35 v1(4822,2890) ; U6.22@4551.03,2424.35 4817.35,2424.35 v1(4823,2430) ; U8.22@4552.03,1524.35 4818.35,1524.35 v1(4824,1530) ; U7.22@4552.03,1984.35 4818.35,1984.35 v1(4824,1990)
  Bottom Layer w10: v1(3800,2890) 3800.8,2889.2 3800.8,2859.97 3801.8,2858.97 3801.8,1530.2 v1(3802,1530) ; v1(4822,2890) 4822.8,2889.2 4822.8,2859.97 4823.8,2858.97 v1@4823.8,1760 ; v1(4824,1530) 4823.8,1530.2 v1@4823.8,1760 ; v1(4824,1760.8) 4824.8,1760 v1@4823.8,1760
D2: K1.25 U1.23 U2.23 U3.23 U4.23 U5.23 U6.23 U7.23 U8.23 | length 7386.1
  Top Layer w10: K1.25 2716,2035 2781,1970 2781,1895.92 2833.92,1843 3661.52,1843 3745.73,1758.8 3768,1758.8 v1(3776.8,1750) ; U1.23@3528.03,2904.04 3769.04,2904.04 v1(3775,2910) ; U2.23@3529.03,2444.04 3770.04,2444.04 v1(3776,2450) ; U4.23@3530.03,1544.04 3771.04,1544.04 v1(3777,1550) ; U3.23@3530.03,2004.04 3771.04,2004.04 v1(3777,2010) ; v1(3776.8,1800.41) 3776.8,1814.8 4418.85,1814.8 4423.85,1809.8 4692.69,1809.8 4716.69,1785.8 4799.2,1785.8 4800,1785 v1(4799.59,1785) ; U5.23@4550.03,2904.04 4791.04,2904.04 v1(4797,2910) ; U6.23@4551.03,2444.04 4792.04,2444.04 v1(4798,2450) ; U8.23@4552.03,1544.04 4793.04,1544.04 v1(4799,1550) ; U7.23@4552.03,2004.04 4793.04,2004.04 v1(4799,2010)
  Bottom Layer w10: v1(3775,2910) 3775.8,2909.2 3775.8,2879.97 3776.8,2878.97 v1(3776.8,1750) 3776.8,1550.2 v1(3777,1550) ; v1(4797,2910) 4797.8,2909.2 4797.8,2879.97 4798.8,2878.97 4798.8,1550.2 v1(4799,1550) ; v1(4799.59,1785) v1@4805,1785
D3: K1.26 U1.25 U2.25 U3.25 U4.25 U5.25 U6.25 U7.25 U8.25 | length 7137.6
  Top Layer w10: K1.26 2699,1985 2764,1920 2764,1888.88 2826.88,1826 3654.48,1826 3750,1730.48 v1(3750,1730) ; U1.25 3529.81,2940.43 3740.43,2940.43 v1(3750,2950) ; U2.25@3529.03,2482.2 3530.81,2480.43 3741.43,2480.43 v1(3751,2490) ; U4.25@3530.03,1582.2 3531.81,1580.43 3742.43,1580.43 v1(3752,1590) ; U3.25@3530.03,2042.2 3531.81,2040.43 3742.43,2040.43 v1(3752,2050) ; v1(3752.59,1822.55) 3752.59,1830.62 3751.42,1831.8 4425.89,1831.8 4430.89,1826.8 4699.73,1826.8 4716.52,1810 v1(4773.8,1810) ; U5.25@4550.03,2942.2 4551.81,2940.43 4762.43,2940.43 v1(4772,2950) ; U6.25@4551.03,2482.2 4552.81,2480.43 4763.43,2480.43 v1(4773,2490) ; U8.25@4552.03,1582.2 4553.81,1580.43 4604.76,1580.43 4615.18,1570 4754,1570 v1(4774,1590) ; U7.25@4552.03,2042.2 4553.81,2040.43 4764.43,2040.43 v1(4774,2050)
  Bottom Layer w10: v1(3750,1730) v1@3751.8,1728.2 ; v1(3750,2950) 3750.8,2949.2 3750.8,2899.97 3751.8,2898.97 v1@3751.8,1823.34 ; v1(3752,1590) 3751.8,1590.2 v1@3751.8,1728.2 ; v1(3752.59,1822.55) v1@3751.8,1823.34 ; v1(4772,2950) 4772.8,2949.2 4772.8,2899.97 4773.8,2898.97 v1(4773.8,1810) 4773.8,1590.2 v1(4774,1590) ; v1@3751.8,1728.2 v1@3751.8,1823.34
D4: K1.27 U1.26 U2.26 U3.26 U4.26 U5.26 U6.26 U7.26 U8.26 | length 6896.2
  Top Layer w10: K1.27 2693.83,1935 2819.83,1809 3647.44,1809 3725.8,1730.64 3725.8,1718.91 v1@3726.86,1717.85 ; U1.26 3723.11,2961.89 3725,2963.78 v1(3725,2970) ; U2.26@3529.03,2501.89 3724.11,2501.89 3726,2503.78 v1(3726,2510) ; U4.26@3530.03,1601.89 3725.11,1601.89 3727,1603.78 v1(3727,1610) ; U3.26@3530.03,2061.89 3725.11,2061.89 3727,2063.78 v1(3727,2070) ; v1(3727.21,1841.59) 3727.21,1846.01 3730,1848.8 4432.93,1848.8 4437.93,1843.8 4706.77,1843.8 4713.97,1836.59 4748.41,1836.59 4749.59,1835.41 v1(4749.59,1835) ; U5.26@4550.03,2961.89 4745.11,2961.89 4747,2963.78 v1(4747,2970) ; U6.26@4551.03,2501.89 4746.11,2501.89 4748,2503.78 v1(4748,2510) ; U8.26@4552.03,1601.89 4553.81,1600.11 4609.11,1600.11 4619.22,1590 4735.22,1590 4749,1603.78 v1(4749,1610) ; U7.26@4552.03,2061.89 4747.11,2061.89 4749,2063.78 v1(4749,2070)
  Bottom Layer w10: v1(3725,2970) 3725.2,2969.8 3725.2,2101.03 3726.2,2100.03 3726.2,1740.44 3725.8,1740.03 3725.8,1719.97 3726.2,1719.56 3726.2,1610.8 v1(3727,1610) ; v1(4747,2970) 4747.2,2969.8 4747.2,2101.03 4748.2,2100.03 4748.2,1610.8 v1(4749,1610)
  other v1: 3725,1710
D5: K1.28 U1.27 U2.27 U3.27 U4.27 U5.27 U6.27 U7.27 U8.27 | length 6664.6
  Top Layer w10: K1.28 2719.79,1885 2812.79,1792 3640.4,1792 3700.41,1731.99 v1(3700.41,1690.17) ; U1.27 3696.57,2981.57 3700,2985 v1(3700,2990) ; U2.27@3529.03,2521.57 3697.57,2521.57 3701,2525 v1(3701,2530) ; U4.27@3530.03,1621.58 3698.57,1621.58 3699.79,1622.79 v1(3699.79,1627.21) ; U3.27@3530.03,2081.57 3698.57,2081.57 3702,2085 v1(3702,2090) ; v1(3702,1860.8) 3707,1865.8 4439.97,1865.8 4444.97,1860.8 v1(4724,1860.8) ; U5.27@4550.03,2981.57 4718.57,2981.57 4722,2985 v1(4722,2990) ; U6.27@4551.03,2521.57 4719.57,2521.57 4723,2525 v1(4723,2530) ; U8.27@4552.03,1621.58 4553.81,1619.8 4613.47,1619.8 4623.26,1610 4709,1610 4724,1625 v1(4724,1630) ; U7.27@4552.03,2081.57 4720.57,2081.57 4724,2085 v1(4724,2090)
  Bottom Layer w10: v1(3700,2990) 3700.8,2989.2 3700.8,2959.97 3701.8,2958.97 v1@3701.8,1860.8 ; v1(3700.41,1690.17) 3700.41,1729.61 ; 3700.8,1729.61 3700.8,1859.59 v1(3702,1860.8) ; v1@3702,1627.21 v1@3702,1690.17 ; v1(4722,2990) 4722.8,2989.2 4722.8,2959.97 4723.8,2958.97 4723.8,1630.2 v1(4724,1630)
D6: K1.29 U1.28 U2.28 U3.28 U4.28 U5.28 U6.28 U7.28 U8.28 | length 6368.5
  Top Layer w10: K1.29 2745.75,1835 2805.75,1775 3633.36,1775 3676,1732.36 v1(3676,1722.17) ; U1.28 3671.26,3001.26 3675,3005 v1(3675,3010) ; U2.28@3529.03,2541.26 v1@3672.26,2541.26 ; U4.28@3530.03,1641.26 v1@3673.26,1641.26 ; U3.28@3530.03,2101.26 v1@3673.26,2101.26 ; v1(3677.59,2198.17) 3677.59,2212.59 3680,2215 4487.12,2215 4511.33,2239.2 4560.03,2239.2 4574.84,2224.39 4683.03,2224.39 4683.64,2225 v1(4699.59,2225) ; U5.28@4550.03,3001.26 4693.26,3001.26 4697,3005 v1(4697,3010) ; U6.28@4551.03,2541.26 v1@4694.26,2541.26 ; U8.28@4552.03,1641.26 4553.81,1639.48 4617.83,1639.48 4630.31,1627 4681,1627 4699,1645 v1(4699,1650) ; U7.28@4552.03,2101.26 v1@4695.26,2101.26
  Bottom Layer w10: v1(3675,3010) 3675.2,3009.8 3675.2,2141.03 3676.2,2140.03 v1@3676.2,1729.8 ; v1(3676,1722.17) v1@3676,1729.8 ; v1@3676.2,1722.17 3676.2,1650.8 v1(3677,1650) ; v1(4697,3010) 4697.2,3009.8 4697.2,2141.03 4699.2,2139.03 4699.2,1669.97 4698.2,1668.97 4698.2,1650.8 v1(4699,1650)
  other v1: 3677,2110 4699,2110 3676,2550 4698,2550
D7: K1.30 U1.29 U2.29 U3.29 U4.29 U5.29 U6.29 U7.29 U8.29 | length 6148.5
  Top Layer w10: K1.30 2771.71,1785 2798.71,1758 3626.32,1758 3651.8,1732.52 3651.8,1670.2 v1(3652,1670) ; U1.29 3645.95,3020.95 3650,3025 v1(3650,3030) ; U2.29@3529.03,2560.95 v1@3646.95,2560.95 ; U4.29@3530.03,1660.94 v1@3647.95,1660.94 ; U3.29@3530.03,2120.95 v1@3647.95,2120.95 ; v1(3650,2215) 3655,2220 3655,2232 4480.08,2232 4504.29,2256.2 4567.07,2256.2 4574.68,2248.59 v1(4673,2248.59) ; U5.29@4550.03,3020.95 4667.94,3020.95 4672,3025 v1(4672,3030) ; U6.29@4551.03,2560.95 v1@4668.94,2560.95 ; U7.29@4552.03,2120.95 v1@4669.94,2120.95 ; U8.29 4616.01,1660.94 4620.47,1656.48 4631.27,1656.48 4633.56,1654.18 4653.62,1654.18 4667.8,1668.36 4667.8,1682.8 v1(4675,1690)
  Bottom Layer w10: v1(3650,2215) v1@3650,2223.2 ; v1(3650,3030) 3650.8,3029.2 3650.8,2999.97 3651.8,2998.97 v1@3651.8,2223.2 ; v1@3651.8,2215 3651.8,1670.2 v1(3652,1670) ; v1(4672,3030) 4672.8,3029.2 4672.8,2999.97 4673.8,2998.97 v1@4673.8,2248.8 ; v1(4673,2248.59) 4673.59,2248.59 v1@4673.8,2248.8 ; v1@4673.8,1699.56 4674.2,1699.97 4674.2,2248.39 v1@4673.8,2248.8
  other v1: 3652,2130 4674,2130 3651,2570 4673,2570
GND: C1.1 C2.1 C3.1 C4.1 C5.1 C6.1 C7.1 C8.1 C9.1 K1.40 R2.2 R4.2 R5.1 R8.1 U0.4 U0.5 U0.8 U1.24 U2.24 U3.24 U4.24 U5.24 U6.24 U7.24 U8.24 U9.1 | length 1919.7
  Top Layer w10: v1(2820,2560) 2825,2560 2847.44,2537.56 C2.1 ; v1(2860,1484) C4.1 ; C3.1 2907.56,1982.44 v1(2910,1980) ; v1(2860,2850) C1.1 ; v1(3455,2925) 3457.48,2922.52 U1.24 ; v1(3460,1560) 3462.52,1562.52 U4.24 ; v1(3460,2465) 3462.48,2462.52 U2.24 ; v1(3460.04,2020) 3457.52,2022.52 U3.24 ; C7.1 3947.56,2027.44 3948,2027 v1(3957,2027) ; C6.1 3950.56,2467.44 v1(3951,2467) ; v1(3900,2880) C5.1 ; C8.1 3952.44,1567.44 v1(3953,1568) ; v1(4475,2920) 4477.52,2922.52 U5.24 ; v1(4485,1565) 4487.48,1562.52 U8.24 ; v1(4485,2460) 4487.52,2462.52 U6.24 ; v1(4490.04,2025) 4492.52,2022.52 U7.24 ; v1(4955,1355) 4960,1355 4967.44,1362.44 C9.1 ; R8.1 v1(4990,1575) 4990,1599 5010,1619 5107.94,1619 5110.94,1616 5143,1616 5214,1545 U0.4 ; v1(5214,1595) U0.5 ; v1(5220,1718) 5247,1745 U0.8
  Top Layer w20: K1.40 2491,1285 v1(2493,1283) ; R4.2 2575,1337 v1(2579,1333) ; R5.1 2690.47,2240 R2.2 2709.47,2244.53 v1(2732,2222) ; U9.1 2792.4,3177.6 v1(2792,3177.2)
  Bottom Layer w10: v1(3460.04,2020) v1@3465,2020 ; v1(3951,2467) v1@3952,2466 ; v1@4485,2025 v1(4490.04,2025) ; v1@5213,1594 v1(5214,1595)
  other v1: 5215,1544
NetK1_2: K1.2 R1.1 | length 236.9
  Top Layer w20: K1.2 2329.53,3180.47 R1.1
NetK1_22: K1.22 R7.1 | length 250.5
  Top Layer w10: K1.22 R7.1
OE: R2.1 R7.2 U1.32 U2.32 U3.32 U4.32 U5.32 U6.32 U7.32 U8.32 | length 5387.4
  Top Layer w10: R7.2 2750,2185 v1(2845,2280) ; v1(2955,2280) 2969,2266 3498.69,2266 3500.89,2268.2 3549.11,2268.2 3551.31,2266 3589,2266 v1(3600,2255) 3600,2265 3601,2266 4466,2266 4500,2300 4625,2300 v1(4622.8,2297.8) ; U1.32 3595,3080 v1(3600,3085) ; U2.32@3529.03,2620 3596,2620 v1(3601,2625) ; U4.32@3530.03,1720 3597,1720 v1(3602,1725) ; U3.32@3530.03,2180 3597,2180 v1(3602,2185) v1@3602,2188 ; U5.32@4550.03,3080 4617,3080 v1(4622,3085) ; U6.32@4551.03,2620 4618,2620 v1(4623,2625) ; U8.32@4552.03,1720 4619,1720 4625,1726 v1(4625,1730) ; U7.32@4552.03,2180 4619,2180 v1(4624,2185)
  Bottom Layer w10: v1(2845,2280) v1(2955,2280) ; v1(3600,3085) 3600.8,3084.2 3600.8,2265 3602,2263.8 v1(3602,2185) v1(3602,1725) ; v1(4622,3085) 4622.8,3084.2 v1(4622.8,2297.8) 4622.8,2186.2 v1(4624,2185) 4624.8,2184.2 4624.8,1730.2 v1(4625,1730)
VCC: C1.2 C2.2 C3.2 C4.2 C5.2 C6.2 C7.2 C8.2 C9.2 U0.16 U1.8 U2.6 U2.8 U3.6 U3.8 U4.6 U4.8 U5.6 U5.8 U6.6 U6.8 U7.6 U7.8 U8.6 U8.8 U9.2 | length 12541
  Top Layer w10: C4.2 2862.87,1580.43 3254.57,1580.43 3254.2,1580.8 3254.2,1615.03 3240.03,1629.2 3219.97,1629.2 3212.34,1621.58 U4.6 ; C3.2 2860,2040.43 2998.22,2040.43 U3.8 3001.78,2040.43 v1@3254.57,2040.43 ; C2.2 2875.8,2482.44 2875.8,2460.8 2910.03,2460.8 2926.92,2477.69 2940.03,2477.69 2944.78,2482.44 2999.76,2482.44 U2.8 3001.78,2480.43 v1@3254.57,2480.43 ; C1.2 2860,2940.43 2998.22,2940.43 U1.8 3000,2940.8 3254.2,2940.8 v1(3255,2940) ; U3.6 3212.34,2081.57 3219.97,2089.2 3240.03,2089.2 3254.2,2075.03 v1@3254.2,2040.8 ; U2.6 3212.34,2521.57 3219.97,2529.2 3240.03,2529.2 3254.2,2515.03 v1@3254.2,2480.8 ; C7.2 3900.98,2081.57 U7.6 4237.34,2081.57 4244.97,2089.2 4265.03,2089.2 4279.2,2075.03 v1@4279.2,2040.8 ; C6.2 3900.98,2521.57 U6.6 4237.34,2521.57 4244.97,2529.2 4265.03,2529.2 4279.2,2515.03 v1@4279.2,2480.8 ; C5.2 3904.02,2981.57 U5.6 4237.34,2981.57 4244.97,2989.2 4265.03,2989.2 4279.2,2975.03 4279.2,2940.8 4025,2940.8 U5.8 ; C8.2 3905.98,1621.58 U8.6 4237.34,1621.58 4244.97,1629.2 4265.03,1629.2 4279.2,1615.03 v1@4279.2,1580.8 ; U8.8@4025,1582.2 4026.78,1580.43 v1@4279.57,1580.43 ; U7.8@4025,2042.2 4026.78,2040.43 v1@4279.57,2040.43 ; U6.8@4025,2482.2 4026.78,2480.43 v1@4279.57,2480.43
  Top Layer w20: U9.2 2862.6,3252.4 2875,3240 v1(3255,3240) 3259.2,3244.2 4287.9,3244.2 4292.9,3249.2 4350.8,3249.2 4474.2,3125.8 4640.8,3125.8 v1(4645,3130) ; C9.2 5012.37,1395.19 5025,1395.19 5025,1380 5032,1373 5035,1373 5045,1363 v1(5045,1355)
  Bottom Layer w10: v1(3255,1580) v1(3255,2040) v1(3255,2480) v1(3255,2940) v1(3255,3240) ; v1(4280,1580) v1(4280,2040) v1(4280,2480) v1(4280,2940) v1(4280,3240)
  Bottom Layer w20: v1(4645,3130) 4650,3130 4980,2800 4980,1800 5045,1735 v1(5045,1355)
VCC_ON: K1.1 R1.2 R3.2 U9.3 | length 2377.9
  Top Layer w10: v1(2604,3210) v1@2609,3215 ; v1(2645,1333) R3.2
  Top Layer w20: K1.1 2329.53,3239.53 R1.2 2584.47,3239.53 2609,3215 U9.3
  Bottom Layer w10: v1(2604,3210) 2604,2870 2496,2762 2496,1969.96 2645,1820.96 v1(2645,1333)
WE: K1.20 U1.5 U2.5 U3.5 U4.5 U5.5 U6.5 U7.5 U8.5 | length 6140.7
  Top Layer w10: K1.20 v1(2715,2285) ; v1(2835,2110) 2843.74,2101.26 U3.5 v1@3194.48,2101.26 ; U4.5 v1@3194.48,1641.26 ; U2.5 v1@3194.48,2541.26 ; U1.5 3194.48,3001.26 3200,3006.78 v1(3200,3010) ; v1(3200,2665) 3200,2675 3200.8,2675.8 3492.52,2675.8 3507.93,2691.2 3542.07,2691.2 3557.48,2675.8 4224.2,2675.8 v1(4225,2675) ; U8.5@4025,1641.26 4219.48,1641.26 4225,1646.78 v1(4225,1650) ; U7.5@4025,2101.26 v1@4219.48,2101.26 ; U6.5@4025,2541.26 v1@4219.48,2541.26 ; U5.5 4219.48,3001.26 4225,3006.78 v1(4225,3010)
  Bottom Layer w10: v1(2715,2285) 2835,2165 v1(2835,2110) ; v1(3200,1650) v1(3200,2110) v1(3200,2550) v1(3200,3010) ; v1(4225,1650) v1(4225,2110) v1(4225,2550) v1(4225,2675) v1(4225,3010)
pads on no net: K1.36 K1.38 K1.39 U1.9 U2.9 U3.9 U4.9 U5.9 U6.9 U7.9 U8.9

## Polygon pours and split planes (outlines as drawn)
GND on Bottom Layer "Bottom Layer-GND" (solid, remove dead copper, pour order 2): 2171,3293 2171,1227 5385,1227 5388,1230 5388,1438 5388,3286 5381,3293 2171,3293

## Keep-outs
Keep-Out Layer:
  lines w5: 2167,1227 2167,3293 5270,3293 cw(c5270,3175) 5388,3175 5388,1345 cw(c5270,1345) 5270,1227 2167,1227

## Other copper
Top Layer:
  text "FOR HP-48" at 5078,3152 h50 r270
  text "FRAM CARD" at 5152,3151 h50 r270

## Silkscreen, mask and mechanical layers (free items; w line width, h text height)
Top Paste:
  text "FOR HP-48" at 5078,3152 h50 r270
  text "FRAM CARD" at 5152,3151 h50 r270
Top Solder:
  text "FOR HP-48" at 5078,3152 h50 r270
  text "FRAM CARD" at 5152,3151 h50 r270
Mechanical 1:
  lines w5: 2167,1227 2167,3293 5270,3293 cw(c5270,3175) 5388,3175 5388,1345 cw(c5270,1345) 5270,1227 2167,1227 ; 5051,1930 ccw(c5141.01,1932.03) 5231.01,1930 5231,2602 ccw(c5141,2602) 5050.99,2602 5051,1930